# Altium PCB Модуль соединений.PcbDoc
Units mm, origin at the board's own origin, x right, y up, seen from the top; angles counter-clockwise.
Board outline 135 x 130 mm, 2 copper layers (Top Layer, Bottom Layer), stack 1.501 mm thick; 33 components, 23 nets, 98 pads, 2 vias.
Unrouted connection lines stored in the file: 1.
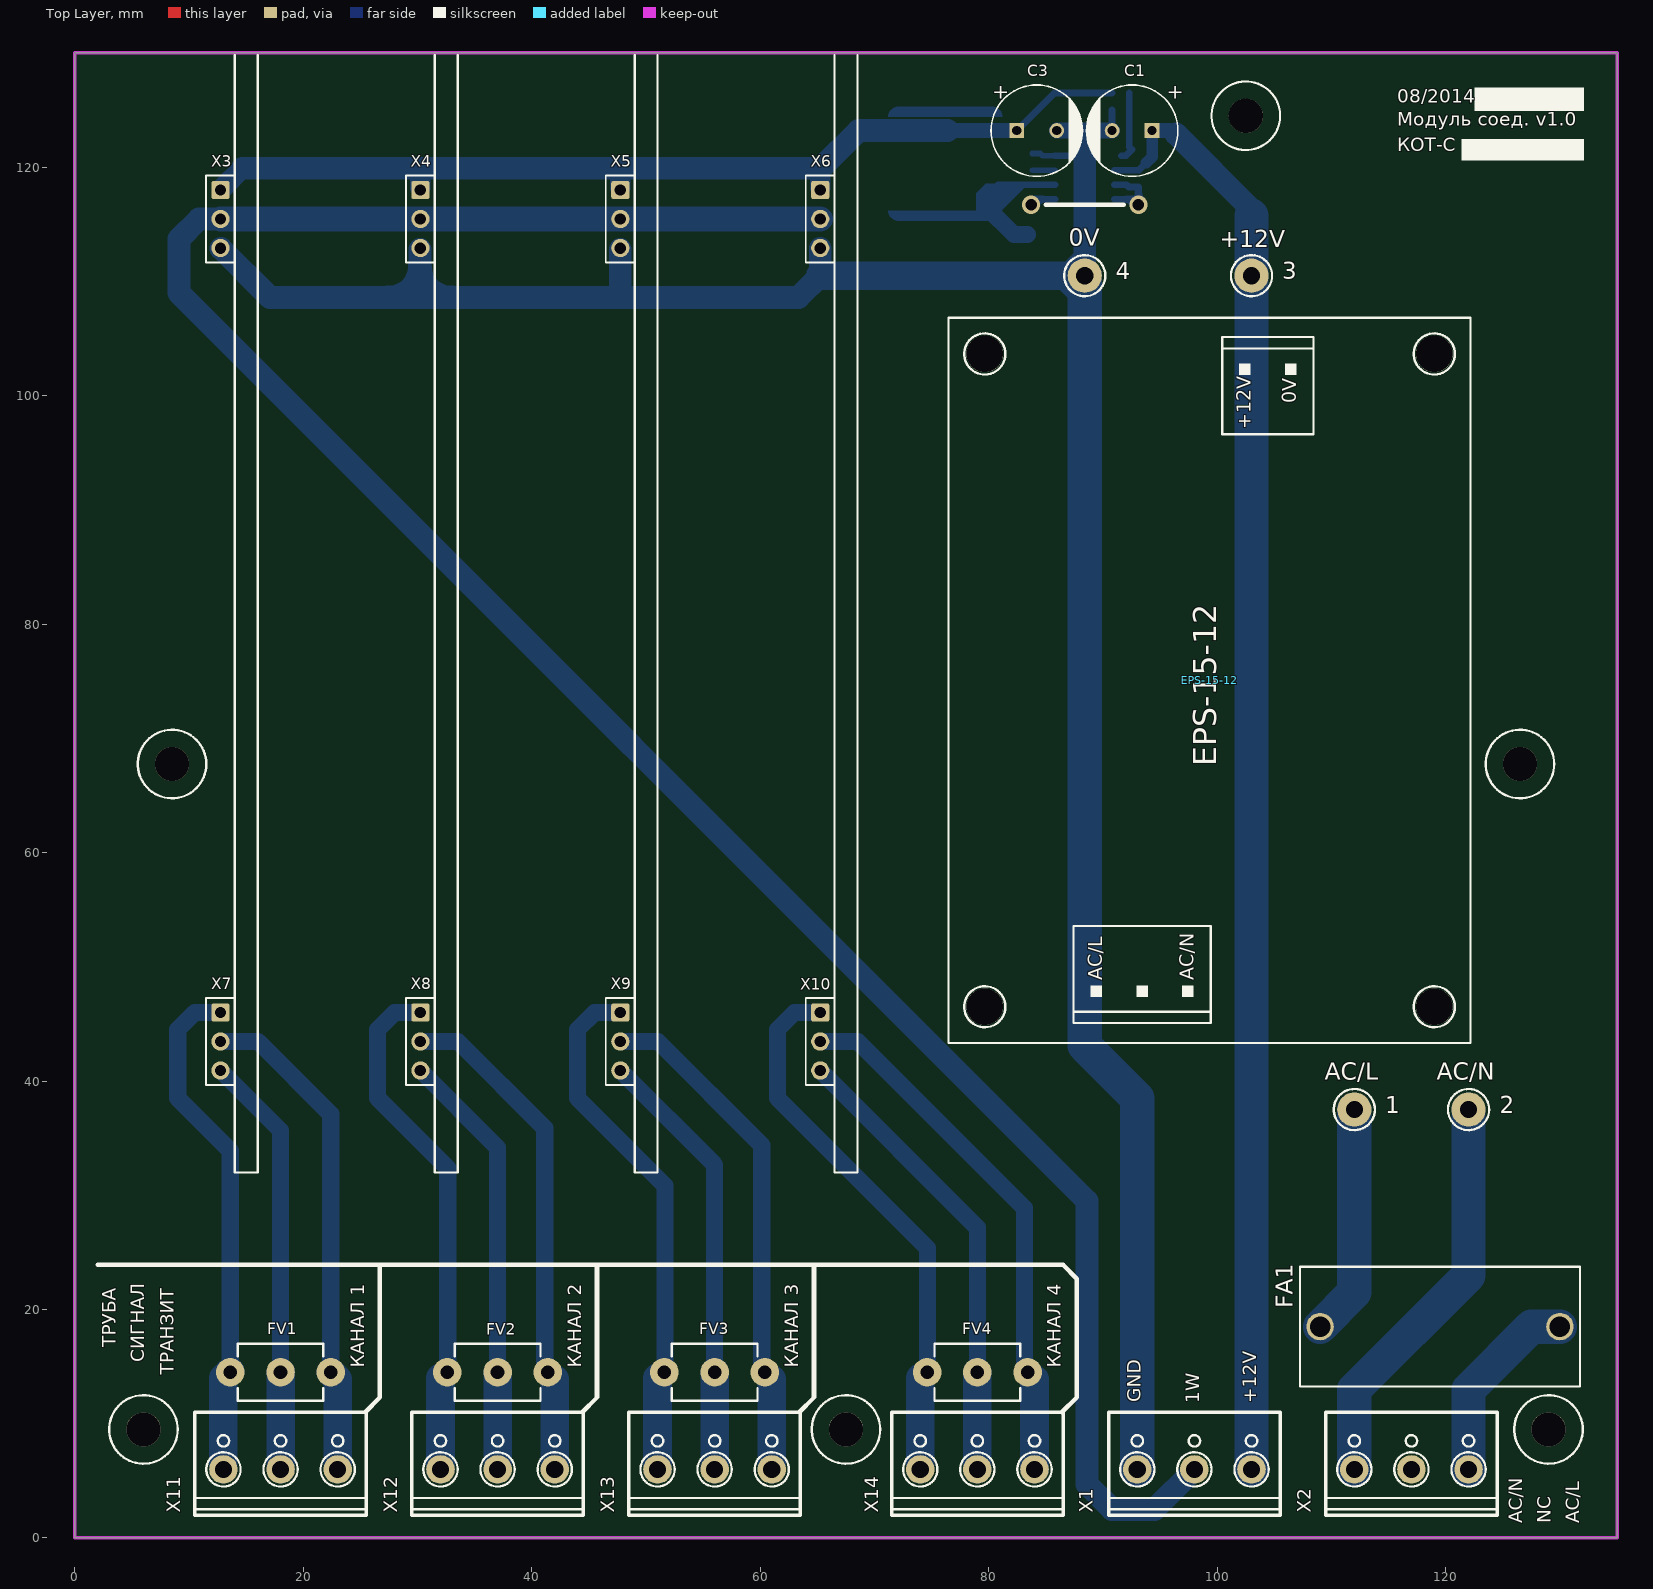
[diagram p0: Top Layer view]
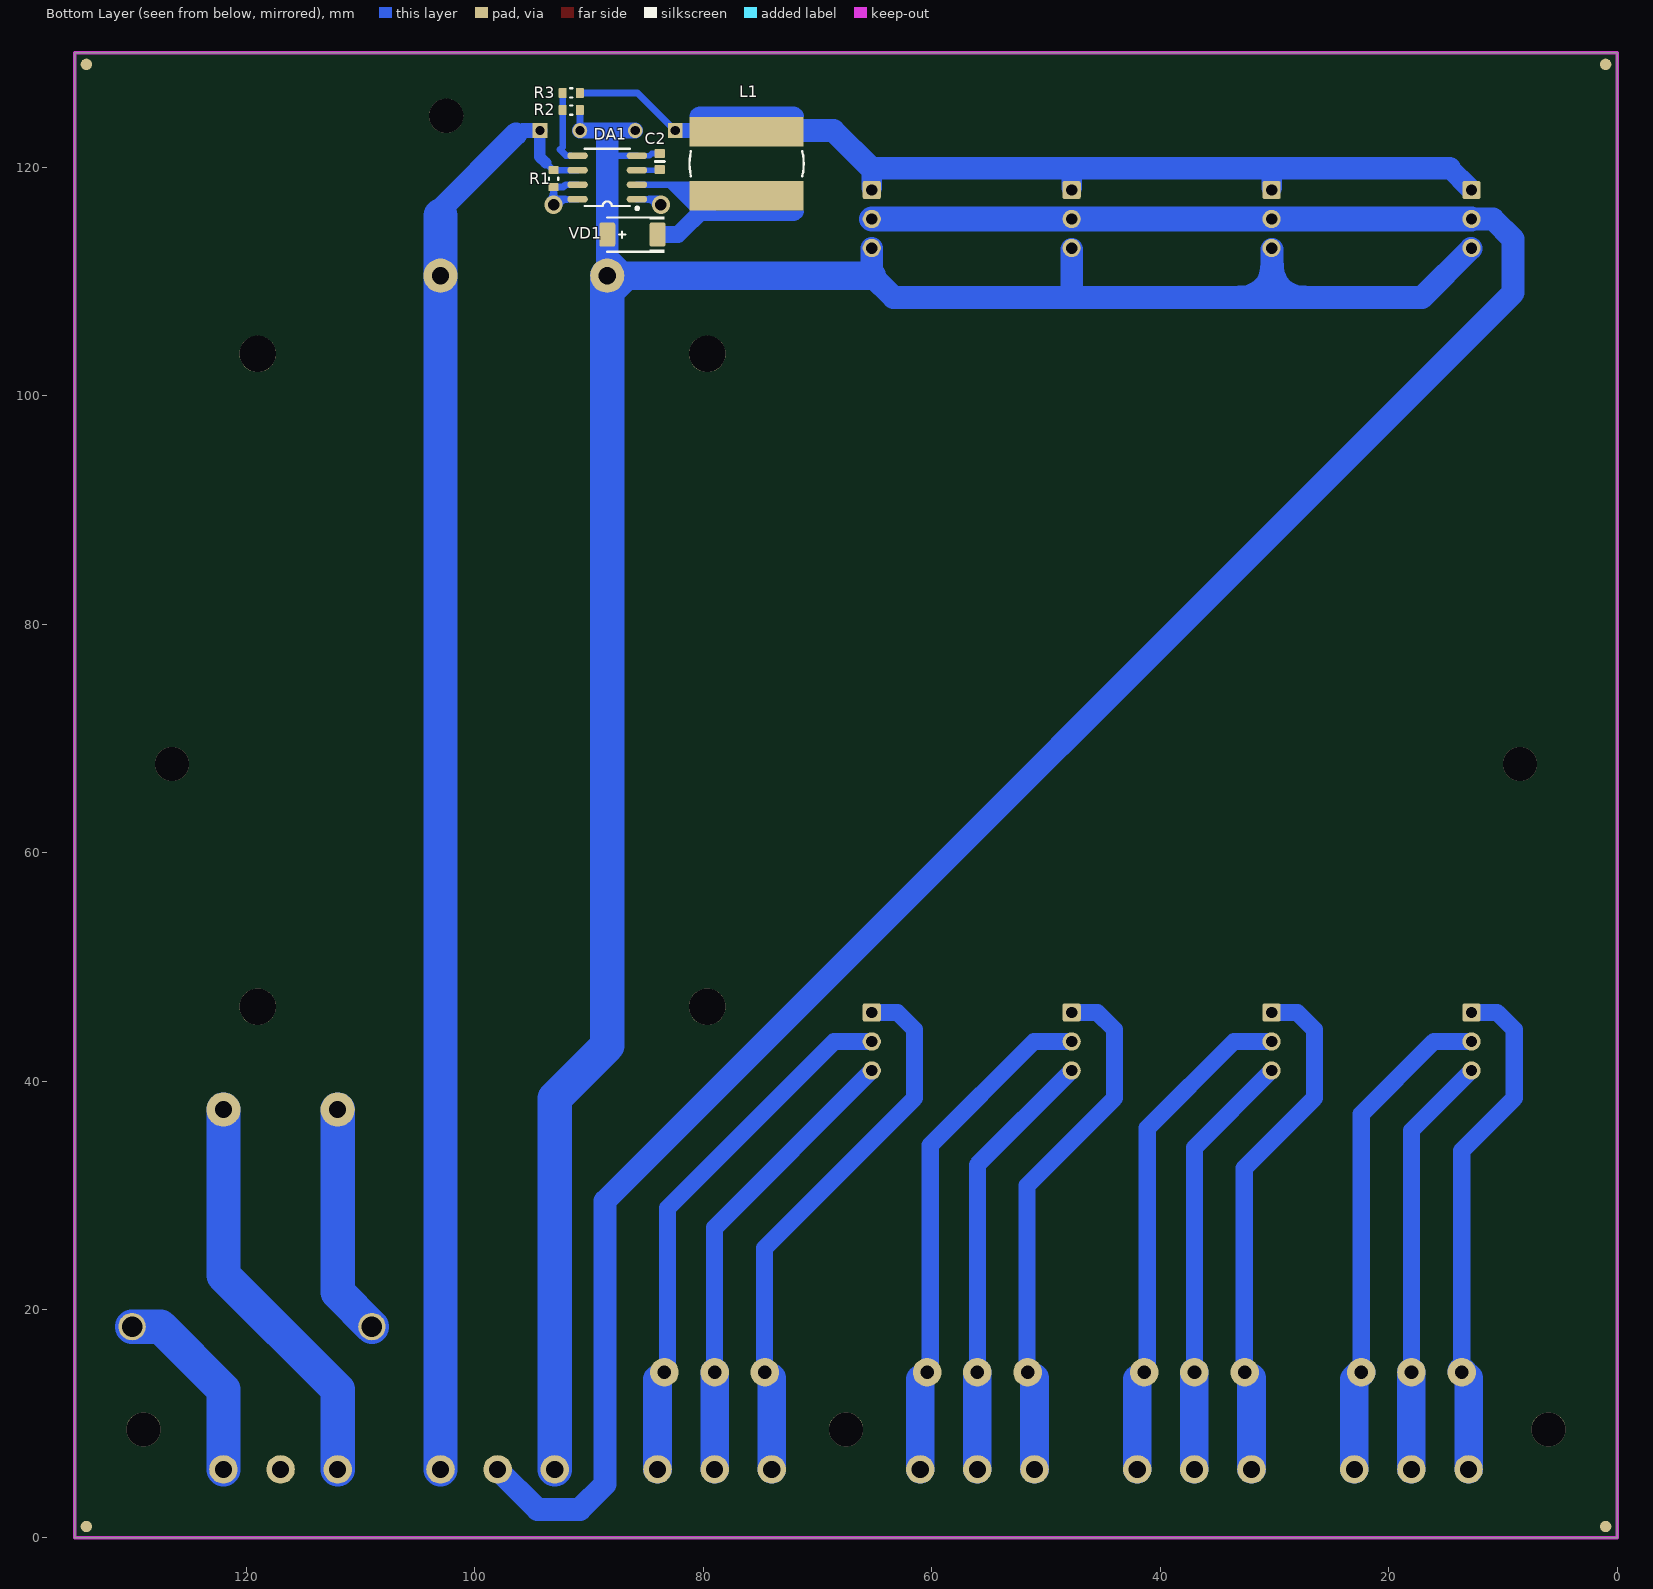
[diagram p1: Bottom Layer view, seen from below]
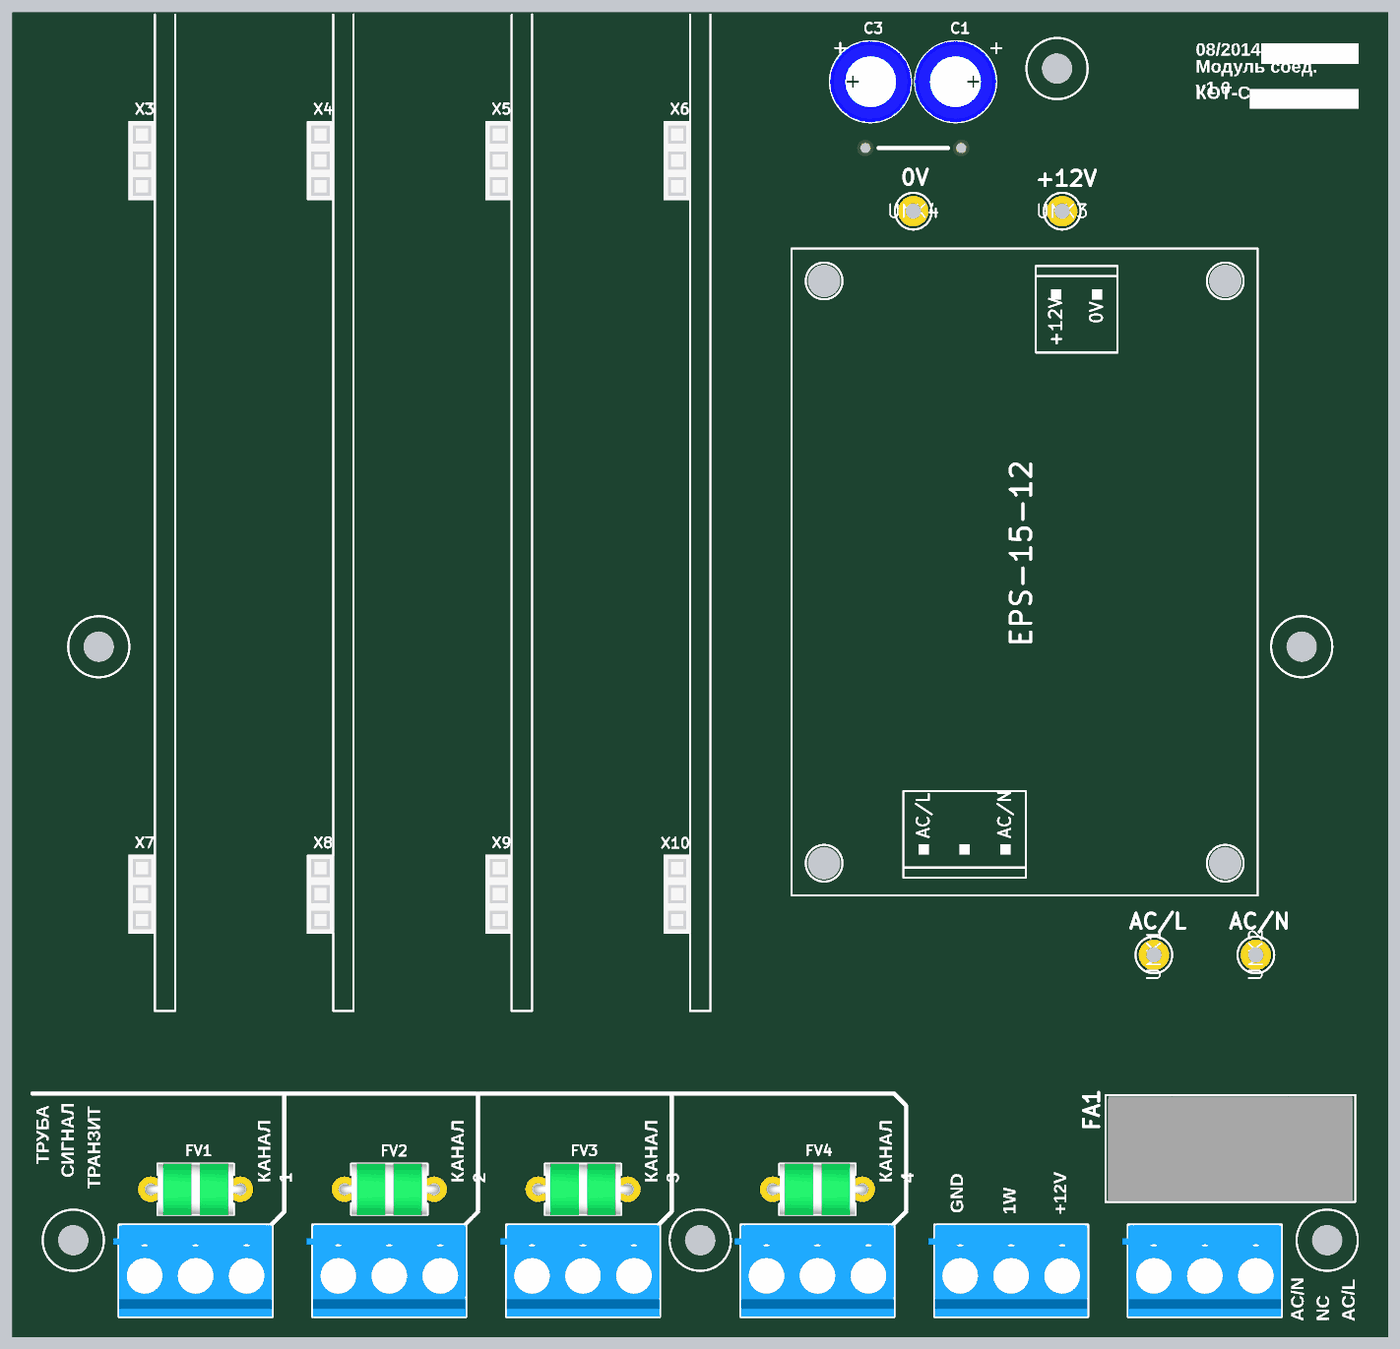
[diagram p2: 3D render of the assembled board from above, using the file's embedded part models]
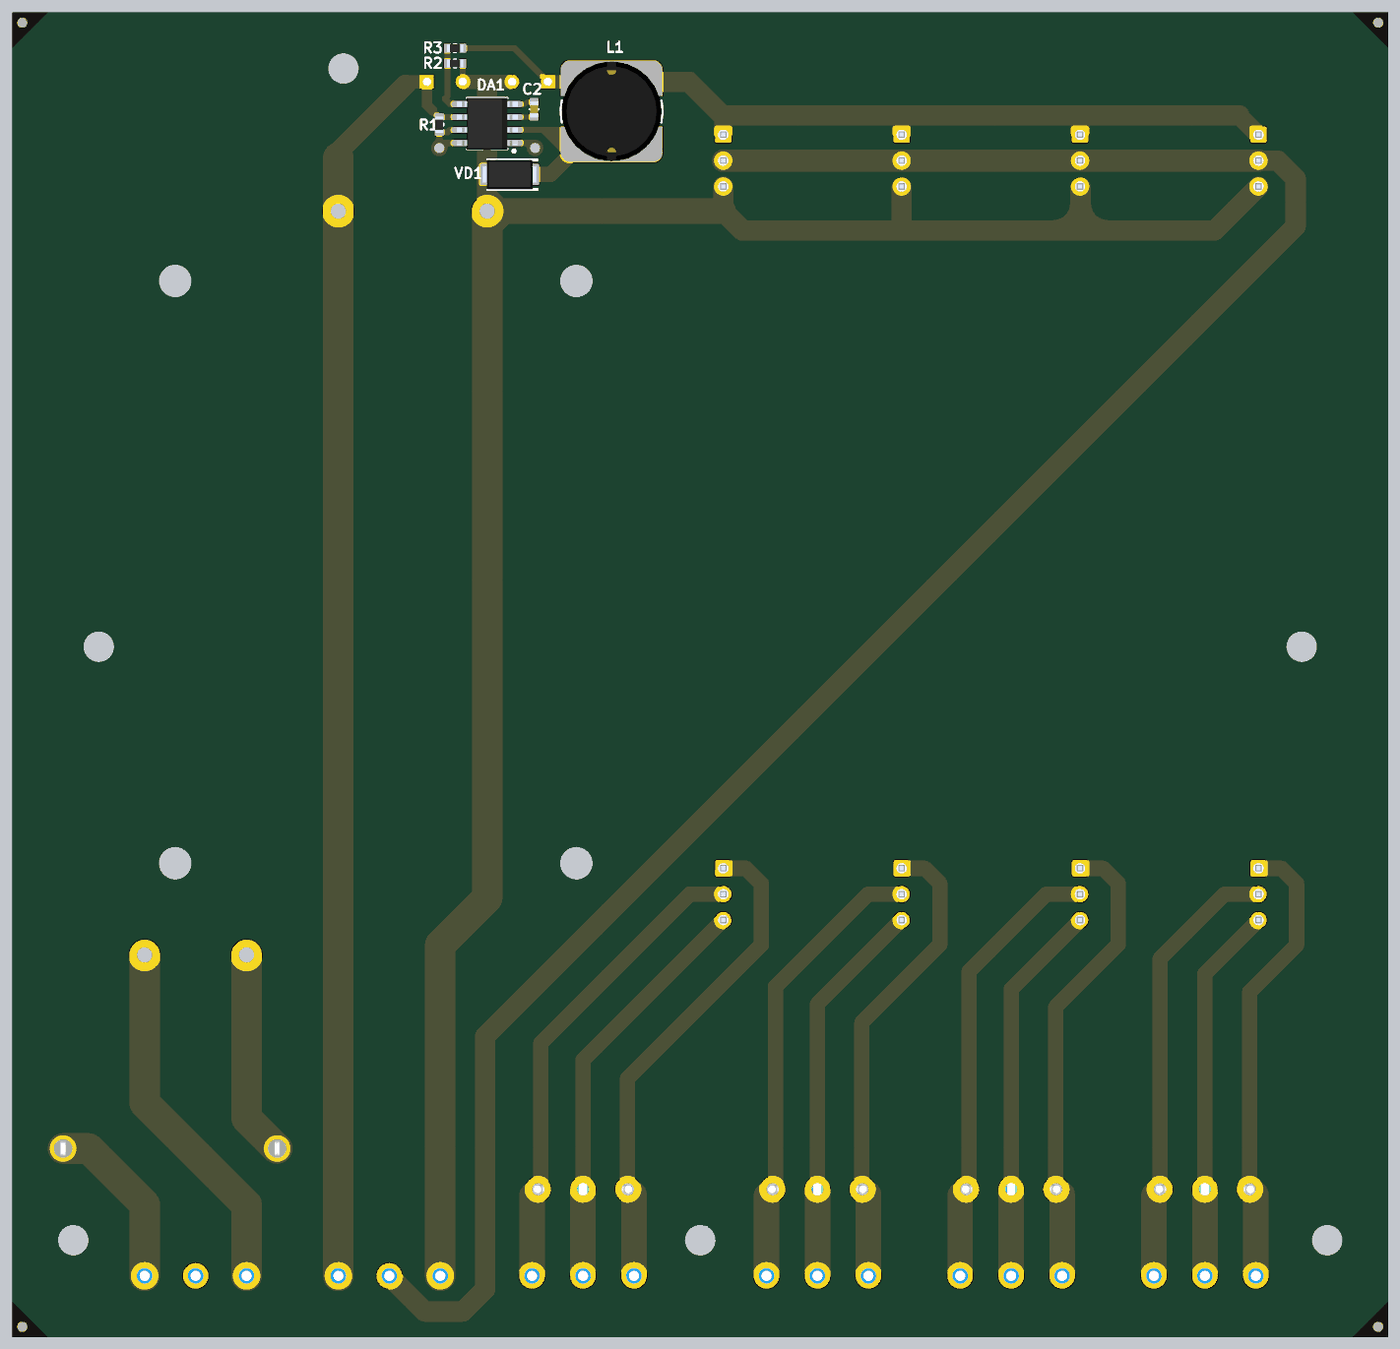
[diagram p3: 3D render of the assembled board from below, using the file's embedded part models]

## Layer stack, top to bottom
Top Solder: solder mask 0.0102, Solder Resist, Dk 3.5
Top Layer: signal copper 0.0356
Dielectric 1: dielectric 1.43, FR-4, Dk 4.8
Bottom Layer: signal copper 0.0356
Bottom Solder: solder mask 0.0102, Solder Resist, Dk 3.5

## Board outline
0,0 0,130 135,130 135,0

## Design rules (kind name [scope] priority, off if disabled: settings)
Clearance Clearance_Polygon [InPolygon] p1: gap=0.2
Clearance [All] p2: gap=0.15
ComponentClearance [All] p1: gap=0 collisioncheckmode=3 verticalgap=0 showdistances=FALSE
HoleSize [All] p1: absolutevalues=TRUE maxlimit=7 minlimit=0.025 maxpercent=80.000 minpercent=20.000
HoleToHoleClearance [All] p1: gap=0.2 allowstackedmicrovias=TRUE
MinimumSolderMaskSliver [All] p1: minsoldermaskwidth=0.05
MinimumSolderMaskSliver SilkscreenOverComponentPads [All] p2: minsoldermaskwidth=0.1
PlaneConnect [All] p1: planeconnectstyle=Direct reliefexpansion=0.508 reliefentries=4 reliefconductorwidth=0.3 reliefairgap=0.254
PolygonConnect PolygonConnect_Vias [All vs isVia] p1: connectstyle=Direct reliefconductorwidth=0.4 reliefentries=4 polygonreliefangle="90 Angle" airgapwidth=0.254
PolygonConnect [All] p2: connectstyle=Relief reliefconductorwidth=0.4 reliefentries=4 polygonreliefangle="90 Angle" airgapwidth=0.254
RoutingVias [All] p1: holewidth=0.4 width=0.8 viastyle="Through Hole" minholewidth=0.3 minwidth=0.3 maxholewidth=2 maxwidth=2
SilkToSilkClearance [All] p1: silktosilkclearance=0
SilkToSolderMaskClearance [IsPad] p1: minsilkscreentomaskgap=0.1 clearancetoexposedcopper=TRUE
SolderMaskExpansion [All] p1: expansion=0.1
Width [All] p1: maxlimit=3 minlimit=0.1 preferedwidth=0.3
23 further rules are at their usual default settings.

## Components (designator, comment, footprint, x,y, rotation, side; value= is the part's Value field where it differs from the comment)
1 "Plated Hole" c150h100 112,37.5 r270 top
2 "Plated Hole" c150h100 122,37.5 r270 top
3 "Plated Hole" c150h100 103,110.5 r0 top
4 "Plated Hole" c150h100 88.4,110.5 r0 top
C1 "ECR-50 В-100 мкФ±20 %" "HITANO D08,0 H12,0 P03,5" 92.55,123.2 r180 top
C2 "NP0 0603-50 В-470 пФ±5 %" CAPC1608L 83.8,120.5 r270 bottom
C3 "ECR-10 В-470 мкФ±20 %" "HITANO D08,0 H12,0 P03,5" 84.2,123.2 r0 top
DA1 "MC33063A" "SO-08 (150MIL)" 88.4,119.1 r0 bottom
EPS-15-12 "EPS-15-12" EPS-15-12 122.175,43.325 r90 top (schematic designator FA1)
FA1 "FH-101" FH-101 119.5,18.5 r180 top
FV1 "2036-35-B2" 2036-35-B2 18,14.5 r180 top
FV2 "2036-35-B2" 2036-35-B2 37,14.5 r180 top
FV3 "2036-35-B2" 2036-35-B2 56,14.5 r180 top
FV4 "2036-35-B2" 2036-35-B2 79,14.5 r180 top
L1 "100мк" SDR1006 76.2,120.3 r90 bottom
R1 "0,22" RESC1608L 93.1,119 r270 bottom
R2 "2к" RESC1608L 91.55,125 r0 bottom
R3 "3,3к" RESC1608L 91.55,126.5 r180 bottom
VD1 "SS16" DO-214AC+ 86.2,114.1 r180 bottom
X1 "DG306-5.0-03P" DG306-5.0-03P 103,6 r180 top
X2 "DG306-5.0-03P" DG306-5.0-03P 122,6 r180 top
X3 "PBS-3" PBS-3 12.744,118 r270 top
X4 "PBS-3" PBS-3 30.244,118 r270 top
X5 "PBS-3" PBS-3 47.744,118 r270 top
X6 "PBS-3" PBS-3 65.244,118 r270 top
X7 "PBS-3" PBS-3 12.744,46 r270 top
X8 "PBS-3" PBS-3 30.244,46 r270 top
X9 "PBS-3" PBS-3 47.744,46 r270 top
X10 "PBS-3" PBS-3 65.244,46 r270 top
X11 "DG306-5.0-03P" DG306-5.0-03P 23,6 r180 top
X12 "DG306-5.0-03P" DG306-5.0-03P 42,6 r180 top
X13 "DG306-5.0-03P" DG306-5.0-03P 61,6 r180 top
X14 "DG306-5.0-03P" DG306-5.0-03P 84,6 r180 top

## Footprints (in the part's own frame and the unit in brackets; to place one, negate y for a bottom-side part, rotate by r counter-clockwise, add the part's x,y. Pads: shape width x height; smd on the part's side, far side on the other; paste and mask are expansions set on the pad)
2036-35-B2 [mm]
  round 2.5 hole 1.2 mask+0.07: 1(-4.4,0) 2(0,0) 3(4.4,0)
  silkscreen extent -3.75,-2.5 3.75,2.5, body extent -4.86,-2.55 4.86,2.55, height 5.15
c150h100 [mm] "Plated Through Hole: Hole Dia.=1mm Pad Dia.=1.5mm"
  round 3 hole 1.5: 1(0,0)
  silkscreen extent -1.8,-1.8 1.8,1.8
CAPC1608L [mm] "Chip Capacitor, Body 1.6x0.8mm, IPC High Density"
  rrect25% 0.8x0.9 smd mask+0.075: 1(-0.7,0) 2(0.7,0)
  silkscreen extent 0,-0.4 0,0.4, body extent -0.8,-0.4 0.8,0.4, height 0.9
DG306-5.0-03P [mm]
  round 2.5 hole 1.5: 1(0,0) 2(5,0) 3(10,0)
  silkscreen extent -2.5,-5 12.5,4, body extent -2.5,-5 13.1,4, height 11.6
DO-214AC+ [mm] "DO-214AC (SMA) 2-Cathode"
  rrect25% 1.4x2.1 smd: 1(-2.2,0)
  rrect25% 1.4x2.1 smd mask+0.1: 2(2.2,0)
  silkscreen extent -2.19,-1.6 2.8,1.6, body extent -2.8,-1.45 2.8,1.45, height 2.4
EPS-15-12 [mm] "MeanWell AC/DC 15W Single Output Switching Power Supply"
  round 3.2 hole 3.2 unplated paste+0 mask+0: 0(3.175,42.525) 0(3.175,3.175) 0(60.325,3.175) 0(60.325,42.525)
  silkscreen extent 0,0 63.5,45.7
FH-101 [mm]
  round 2.4 hole 1.8: 1(-10.5,0) 2(10.5,0)
  silkscreen extent -12.25,-5.25 12.25,5.25, body extent -12,-5.1 12,5.1, height 11.02
"HITANO D08,0 H12,0 P03,5" [mm]
  rect 1.3x1.3 hole 0.8: 1(-1.75,0)
  round 1.3 hole 0.8: 2(1.75,0)
  silkscreen extent -4,-4 4,4, body extent -3.98,-3.99 3.98,3.99, height 12.02
PBS-3 [mm]
  rrect25% 1.6x1.6 hole 1: 1(0,0)
  round 1.6 hole 1: 2(2.54,0) 3(5.08,0)
  silkscreen extent -1.27,-1.27 6.35,1.27, body extent -1.28,-1.27 6.34,1.27, height 8.5
RESC1608L [mm] "Chip Resistor, Body 1.6x0.8mm, IPC High Density"
  rrect25% 0.7x0.9 smd mask+0.075: 1(-0.75,0) 2(0.75,0)
  silkscreen extent -0.1,-0.4 0.1,0.4, body extent -0.8,-0.4 0.8,0.4, height 0.5
SDR1006 [mm]
  rect 2.6x10 smd paste-0.025: 1(-2.8,0) 2(2.8,0)
  Top Layer region: -4.1,5 -4.444,4.931 -4.736,4.736 -4.931,4.444 -5,4.1 -5,4.1 -5,-4.1 -4.931,-4.444 -4.736,-4.736 -4.444,-4.931 -4.1,-5 -4.1,-5
  Top Layer region: 4.1,5 4.444,4.931 4.736,4.736 4.931,4.444 5,4.1 5,4.1 5,-4.1 4.931,-4.444 4.736,-4.736 4.444,-4.931 4.1,-5 4.1,-5
  silkscreen extent -1.1,-5 1.1,5, body extent -4.9,-4.89 4.9,4.89, height 5.85
"SO-08 (150MIL)" [mm]
  oval 1.8x0.6 smd: 1(-2.6,1.905) 2(-2.6,0.635) 3(-2.6,-0.635) 4(-2.6,-1.905) 5(2.6,-1.905) 6(2.6,-0.635) 7(2.6,0.635) 8(2.6,1.905)
  silkscreen extent -2.75,-2.5 2,2.82, body extent -3,-2.54 3,2.54, height 1.7

## Part data
1 2 3 4: library part PLATED_HOLE1.0_PAD1.5, "Single Terminal Socket"
EPS-15-12: library part FH-101C, "FH-101"
L1: library part "SDR1006-101KL 100 мкГн", "SDR1006-101KL 100 мкГн"
R1: library part "0603 0,22 Ом±5 %", "0603 0,22 Ом±5 %"
R2: library part "0603 10 кОм±1 %", "0603 10 кОм±1 %"
R3: library part "0603 16 кОм±1 %", "0603 16 кОм±1 %"

## Free pads (board coordinates)
  round 1 smd far side paste-0.025 mask+0.5: 0(1,1) 0(1,129) 0(134,1) 0(134,129)
  round 3 hole 3 unplated paste+0 mask+0: 0(6,9.5) 0(8.5,67.75) 0(67.5,9.5) 0(102.5,124.5) 0(126.5,67.75) 0(129,9.5)

## Via types
v1: diameter 1.6, hole 1, Top Layer to Bottom Layer, 2 vias

## Nets (pads, with @x,y where several pads share a name; then routed paths per layer and width w, separated by ;. In a path a pad name is that pad's centre, name@x,y a point inside that pad or via, vN(x,y) a via of type N, cw(c..) or ccw(c..) an arc to the next point about the centre after c; other vN are vias at no path point)
1WIRE: X1.2 X3.2 X4.2 X5.2 X6.2 | length 210.6
  Bottom Layer w2: X3.2 10.86,115.46 9.1,113.7 9.1,109 88.6,29.5 88.6,4.7 90.8,2.5 94.5,2.5 X1.2
  Bottom Layer w2.2: X3.2 X4.2 X5.2 X6.2
+3.3V: C3.1 L1.2 R3.2 X3.1 X4.1 X5.1 X6.1 | length 86
  Bottom Layer w0.6: C3.1 85.75,126.5 R3.2
  Bottom Layer w1.3: L1.2@76.4,123.2 C3.1
  Bottom Layer w1.8: X3.1@12.922,118.178 14.644,119.9 ; X4.1@30.244,118.2 30.244,119.756 ; X5.1@47.744,118.2 47.744,119.756 ; X6.1@65.244,118.2 65.244,119.756
  Bottom Layer w2: 14.644,119.9 65.3,119.9 68.6,123.2 L1.2@76.4,123.2
+12V: 3.1 C1.1 DA1.6 R1.1 X1.1 | length 127.5
  Bottom Layer w0.6: DA1.6 R1.1@93.135,119.735 ; R1.1 93.15,119.75 93.7,120.3
  Bottom Layer w1: 93.8,120.4 94.3,120.9 C1.1
  Bottom Layer w1.3: C1.1 95.8,123.2 96.1,122.9
  Bottom Layer w2: 96.4,122.9 103,116.3 103,115.75
  Bottom Layer w3: X1.1 3.1 103,115.75
AC/L: FA1.1 X2.1 | length 17.3
  Bottom Layer w3: X2.1 122,13 127.5,18.5 FA1.1
AC/N: 2.1 X2.3 | length 35.6
  Bottom Layer w3: X2.3 112,13 122,23 2.1
GND: 4.1 C1.2 C2.1 C3.2 DA1.4 R2.1 VD1.1 X1.3 X3.3 X4.3 X5.3 X6.3 | length 217.6
  Bottom Layer w0.5: C2.1 84.5,121.2 84.695,121.005 DA1.4@85.605,121.005
  Bottom Layer w0.6: DA1.4 88.295,121.005 ; C1.2 R2.1
  Bottom Layer w1.4: C3.2 C1.2
  Bottom Layer w2: X3.3@12.782,112.882 17.064,108.6 30.2,108.6 ; X4.3@30.2,112.8 30.2,108.6 ; 47.744,108.656 X5.3@47.744,112.8 ; X6.3@65.244,112.9 65.244,110.5 63.344,108.6 30.2,108.6 ; 4.1@88.4,111.5 VD1.1 88.4,122.7
  Bottom Layer w2.5: 65.244,110.5 4.1
  Bottom Layer w3: 4.1 88.4,43.1 93,38.5 X1.3
Net1_1: 1.1 FA1.2 | length 20.2
  Bottom Layer w3: FA1.2 112,21.5 1.1
NetC2_2: C2.2 DA1.3 | length 2
  Bottom Layer w0.5: C2.2@83.835,119.735 DA1.3
NetDA1_1: DA1.1 DA1.7 DA1.8 R1.2 | length 7.7
  Bottom Layer w0.6: v1@83.8,117.195 DA1.1 ; DA1.8 v1@93,117.195 ; DA1.7 92.035,118.465 92.25,118.25 R1.2 v1(93.1,116.7)
  other v1: 83.7,116.7
NetDA1_2: DA1.2 L1.1 VD1.2 | length 10.6
  Bottom Layer w0.6: L1.1@80.3,117.9 80.865,118.465 DA1.2
  Bottom Layer w1.5: L1.1@79.85,116.75 79.85,116.45 82.2,114.1 VD1.2@83.4,114.1
NetDA1_5: DA1.5 R2.2 R3.1 | length 5.9
  Bottom Layer w0.6: DA1.5@91.605,121.005 92.005,121.005 92.55,121.55 ; 92.3,121.75 R3.1
PIPE_CH1: FV1.3 X7.1 X11.3 | length 45
  Bottom Layer w1.5: X7.1 10.5,46 9,44.5 9,38.5 13.6,33.9 FV1.3@13.6,14.6
  Bottom Layer w2.5: X11.3 13,14 FV1.3@13.6,14.6
PIPE_CH2: FV2.3 X8.1 X12.3 | length 44.9
  Bottom Layer w1.5: X8.1 28,46 26.5,44.5 26.5,38.5 32.641,32.359 FV2.3@32.641,14.5
  Bottom Layer w2.5: X12.3 FV2.3@32,14
PIPE_CH3: FV3.3 X9.1 X13.3 | length 45.5
  Bottom Layer w1.5: X9.1 45.5,46 44,44.5 44,38.5 51.641,30.859 FV3.3@51.641,14.5
  Bottom Layer w2.5: X13.3 FV3.3@51,14
PIPE_CH4: FV4.3 X10.1 X14.3 | length 47.8
  Bottom Layer w1.5: X10.1 63,46 61.5,44.5 61.5,38.5 74.641,25.359 FV4.3@74.641,14.5
  Bottom Layer w2.5: X14.3 FV4.3@74,14
SIGNAL_CH1: FV1.2 X7.3 X11.2 | length 37.1
  Bottom Layer w1.5: X7.3 18,35.664 FV1.2
  Bottom Layer w2.5: X11.2 FV1.2
SIGNAL_CH2: FV2.2 X8.3 X12.2 | length 37.7
  Bottom Layer w1.5: X8.3 37,34.164 FV2.2
  Bottom Layer w2.5: X12.2 FV2.2
SIGNAL_CH3: FV3.2 X9.3 X13.2 | length 38.3
  Bottom Layer w1.5: X9.3 56,32.664 FV3.2
  Bottom Layer w2.5: X13.2 FV3.2
SIGNAL_CH4: FV4.2 X10.3 X14.2 | length 40.6
  Bottom Layer w1.5: X10.3 79,27.164 FV4.2
  Bottom Layer w2.5: X14.2 FV4.2
TRANSIT_CH1: FV1.1 X7.2 X11.1 | length 43.6
  Bottom Layer w1.5: X7.2 16.04,43.46 22.4,37.1 FV1.1
  Bottom Layer w2.5: FV1.1 23,13.9 X11.1
TRANSIT_CH2: FV2.1 X8.2 X12.1 | length 43.3
  Bottom Layer w1.5: X8.2 33.54,43.46 41.127,35.873 FV2.1@41.127,14.5
  Bottom Layer w2.5: X12.1 FV2.1@42,13.9
TRANSIT_CH3: FV3.1 X9.2 X13.1 | length 43.9
  Bottom Layer w1.5: X9.2 51.04,43.46 60.127,34.373 FV3.1@60.127,14.5
  Bottom Layer w2.5: X13.1 FV3.1@61,13.9
TRANSIT_CH4: FV4.1 X10.2 X14.1 | length 46.2
  Bottom Layer w1.5: X10.2 68.54,43.46 83.127,28.873 FV4.1@83.127,14.5
  Bottom Layer w2.5: X14.1 FV4.1@84,13.9
pads on no net: EPS-15-12.0 X2.2

## Keep-outs
Keep-Out Layer:
  the board outline again, w0.3

## Other copper
Bottom Layer:
  region net GND: 87.5,112.5 86,111 85,111 85,110.5 87.5,108 89,109.5 89,111
  region net NetDA1_2: 83.392,118.492 80.9,116 78.9,116 78.9,117.7 79.794,118.594

## Silkscreen, mask and mechanical layers (free items; w line width, h text height)
Top Overlay:
  circle w0.2: c67.5,9.5 r3
  circle w0.2: c129,9.5 r3
  circle w0.2: c6,9.5 r3
  circle w0.2: c126.5,67.75 r3
  circle w0.2: c102.5,124.5 r3
  circle w0.2: c8.5,67.75 r3
  rectangle: 121.39,120.576 132.095,122.472
  rectangle: 122.509,124.939 132.095,126.954
  lines w0.2: 14,129.8 14,32 16,32 16,129.8 ; 31.5,129.8 31.5,32 ; 33.5,129.8 33.5,32 ; 49,129.8 49,32 ; 51,129.8 51,32 ; 66.5,129.8 66.5,32 ; 68.5,129.8 68.5,32 ; 31.5,32 33.5,32 ; 31.5,32 33.5,32 ; 49,32 51,32 ; 49,32 51,32 ; 66.5,32 68.5,32 ; 66.5,32 68.5,32
  lines w0.4: 2,23.9 86.5,23.9 87.7,22.7 87.7,12.3 86.4,11 ; 25.4,11 26.7,12.3 26.7,23.9 ; 44.4,11 45.7,12.3 45.7,23.9 ; 63.4,11 64.7,12.3 64.7,23.9 ; 85,116.7 91.8,116.7
  text "+" at 80.3,126 h1.3
  text "+" at 95.6,126 h1.3
  text "08/2014" at 115.75,125.25 h2
  text "Модуль соед. v1.0" at 115.75,123.25 h2
  text "КОТ-С" at 115.75,121 h2
  text "0V" at 87,113.1 h1.5
  text "+12V" at 100.2,113 h1.5
  text "AC/L" at 109.4,40.1 h1.5
  text "AC/N" at 119.2,40.1 h1.5
  text "ТРУБА" at 3.975,16.7 h2 r90
  text "СИГНАЛ" at 6.475,15.4 h2 r90
  text "КАНАЛ 1" at 25.7,14.9 h2 r90
  text "КАНАЛ 2" at 44.7,14.9 h2 r90
  text "КАНАЛ 3" at 63.7,14.9 h2 r90
  text "КАНАЛ 4" at 86.7,14.9 h2 r90
  text "ТРАНЗИТ" at 9.05,14.3 h2 r90
  text "GND" at 93.7,11.9 h2 r90
  text "1W" at 98.8,11.8 h2 r90
  text "+12V" at 103.8,11.8 h2 r90
  text "AC/N" at 127.1,1.3 h2 r90
  text "NC" at 129.6,1.3 h2 r90
  text "AC/L" at 132.1,1.3 h2 r90
Bottom Solder:
  region: 0,0 3.5,0 0,3.5
  region: 135,0 131.5,0 135,3.5
  region: 135,130 131.5,130 135,126.5
  region: 0,130 3.5,130 0,126.5
Mechanical 1:
  circle w0.2: c32.5,9.5 r4.5
  circle w0.2: c102.5,9.5 r4.5
  circle w0.2: c129,9.5 r4.5
  circle w0.2: c67.5,9.5 r4.5
  circle w0.2: c6,9.5 r4.5
  circle w0.2: c32.5,124.5 r4.5
  circle w0.2: c102.5,124.5 r4.5
  circle w0.2: c126.5,67.75 r4.5
  circle w0.2: c8.5,67.75 r4.5
  circle w0.2: c140,67.75 r4.5
  circle w0.2: c-5,67.75 r4.5
  circle w0.2: c-5,95.25 r4.5
  circle w0.2: c140,95.25 r4.5
  lines w0.2: 0,25 136,25 ; 12.9,131.5 12.9,130 13.7,130 13.7,131.5 ; 15,131 15,131.5 ; 16.3,131.5 16.3,130 17.1,130 17.1,131.5 ; 30.4,131.5 30.4,130 31.2,130 31.2,131.5 ; 32.5,131 32.5,131.5 ; 33.8,131.5 33.8,130 34.6,130 34.6,131.5 ; 47.9,131.5 47.9,130 48.7,130 48.7,131.5 ; 50,131 50,131.5 ; 51.3,131.5 51.3,130 52.1,130 52.1,131.5 ; 65.4,131.5 65.4,130 66.2,130 66.2,131.5 ; 67.5,131 67.5,131.5 ; 68.8,131.5 68.8,130 69.6,130 69.6,131.5 ; 82.9,131.5 82.9,130 83.7,130 83.7,131.5 ; 86.3,131.5 86.3,130 87.1,130 87.1,131.5 ; 100.4,131.5 100.4,130 101.2,130 101.2,131.5 ; 103.8,131.5 103.8,130 104.6,130 104.6,131.5 ; 117.9,131.5 117.9,130 118.7,130 118.7,131.5 ; 121.3,131.5 121.3,130 122.1,130 122.1,131.5 ; -1,31.5 136,31.5 ; -1,31.5 -1,131.5 ; -1,31.5 -1,-23 136,-23 136,25 ; -1,31.5 136,131.5 ; -1,131.5 136,131.5 ; -1,131.5 136,31.5 ; 136,25 136,31.5 ; 136,31.5 136,131.5
Mechanical 13:
  lines w0.2: 12.185,46.559 12.744,46 ; 12.185,118.559 12.744,118 ; 12.236,45.492 12.744,46 ; 12.236,117.492 12.744,118 ; 12.9,31.5 12.9,33 13.7,33 13.7,31.5 ; 13.252,45.492 12.744,46 ; 13.252,117.492 12.744,118 ; 13.303,46.559 12.744,46 ; 13.303,118.559 12.744,118 ; 15,131 15,118 ; 16.3,31.5 16.3,33 17.1,33 17.1,31.5 ; 29.685,46.559 30.244,46 ; 29.685,118.559 30.244,118 ; 29.736,45.492 30.244,46 ; 29.736,117.492 30.244,118 ; 30.4,31.5 30.4,33 31.2,33 31.2,31.5 ; 30.752,45.492 30.244,46 ; 30.752,117.492 30.244,118 ; 30.803,46.559 30.244,46 ; 30.803,118.559 30.244,118 ; 32.5,131 32.5,118 ; 33.8,31.5 33.8,33 34.6,33 34.6,31.5 ; 47.185,46.559 47.744,46 ; 47.185,118.559 47.744,118 ; 47.236,45.492 47.744,46 ; 47.236,117.492 47.744,118 ; 47.9,31.5 47.9,33 48.7,33 48.7,31.5 ; 48.252,45.492 47.744,46 ; 48.252,117.492 47.744,118 ; 48.303,46.559 47.744,46 ; 48.303,118.559 47.744,118 ; 50,131 50,118 ; 51.3,31.5 51.3,33 52.1,33 52.1,31.5 ; 64.685,46.559 65.244,46 ; 64.685,118.559 65.244,118 ; 64.736,45.492 65.244,46 ; 64.736,117.492 65.244,118 ; 65.4,31.5 65.4,33 66.2,33 66.2,31.5 ; 65.752,45.492 65.244,46 ; 65.752,117.492 65.244,118 ; 65.803,46.559 65.244,46 ; 65.803,118.559 65.244,118 ; 67.5,131 67.5,118 ; 68.8,31.5 68.8,33 69.6,33 69.6,31.5 ; 82.9,31.5 82.9,33 83.7,33 83.7,31.5 ; 86.3,31.5 86.3,33 87.1,33 87.1,31.5 ; 100.4,31.5 100.4,33 101.2,33 101.2,31.5 ; 103.8,31.5 103.8,33 104.6,33 104.6,31.5 ; 117.9,31.5 117.9,33 118.7,33 118.7,31.5 ; 121.3,31.5 121.3,33 122.1,33 122.1,31.5 ; 12.744,46 15,46 15,118 ; 12.744,118 15,118 ; 30.244,46 32.5,46 32.5,118 ; 30.244,118 32.5,118 ; 47.744,46 50,46 50,118 ; 47.744,118 50,118 ; 65.244,46 67.5,46 67.5,118 ; 65.244,118 67.5,118
Mechanical 15:
  text "Односторонняя плата 130х135 мм, d=1,5 мм." at -1,136.3 h5

## Text inside footprints (layer, text, board x,y; h text height)
EPS-15-12: Top Overlay "0V" at 106.925,99.325 h1.2 r90; Top Overlay "+12V" at 102.925,97.075 h1.2 r90; Top Overlay "AC/L" at 89.925,48.825 h1.2 r90; Top Overlay "AC/N" at 97.925,48.825 h1.2 r90